# Altium PCB PS.PcbDoc
Units mm, origin at the board's own origin, x right, y up, seen from the top; angles counter-clockwise.
Board outline 152.4 x 101.6 mm, 2 copper layers (Top Layer, Bottom Layer); 14 components, 8 nets, 32 pads, 0 vias.
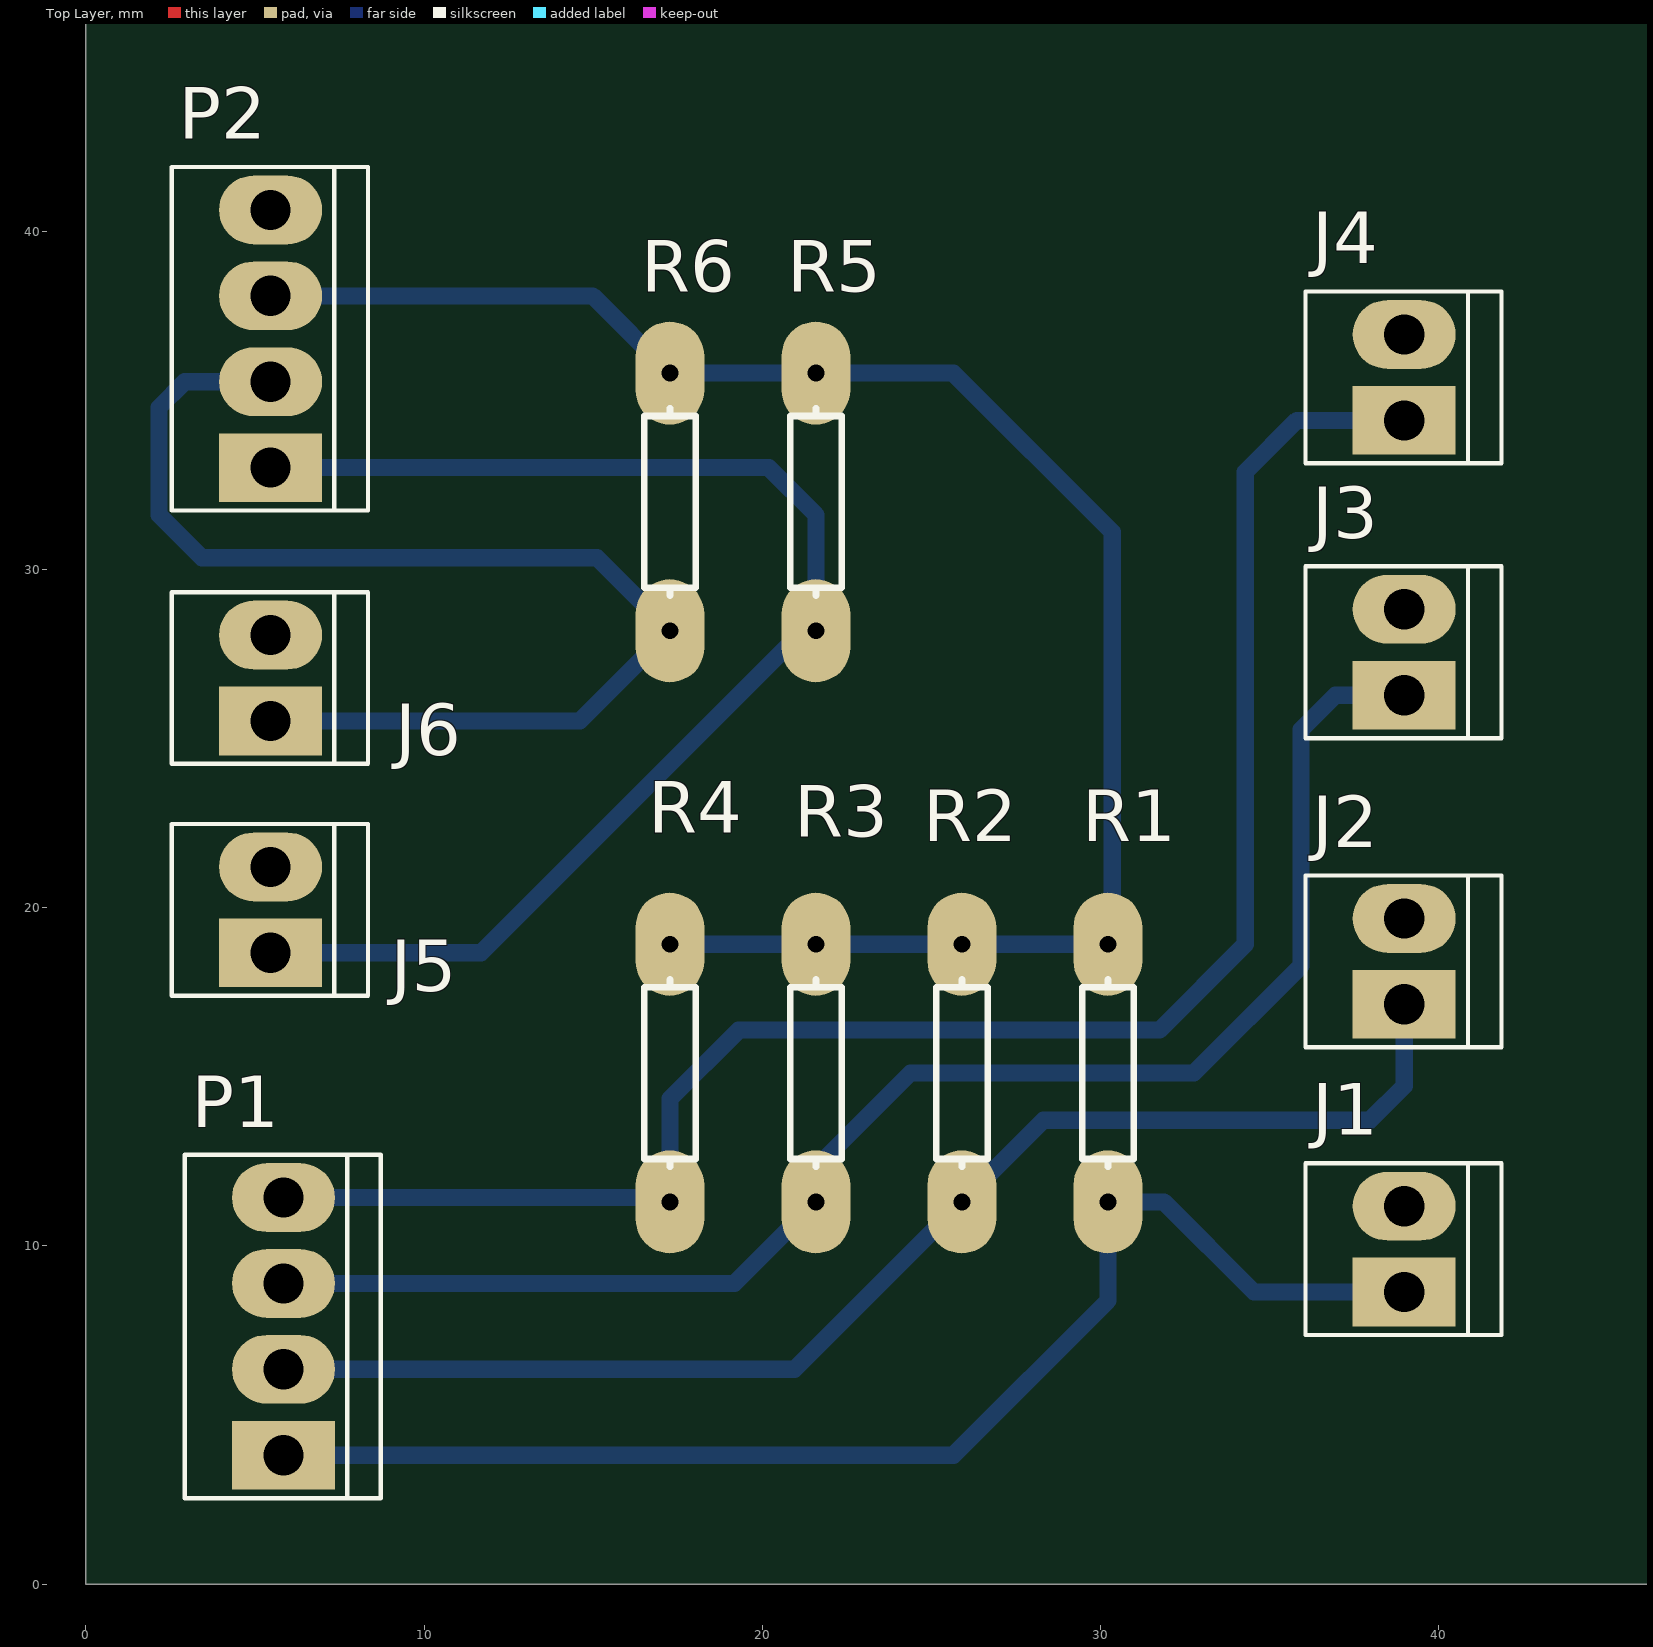
[diagram p0: Top Layer view]
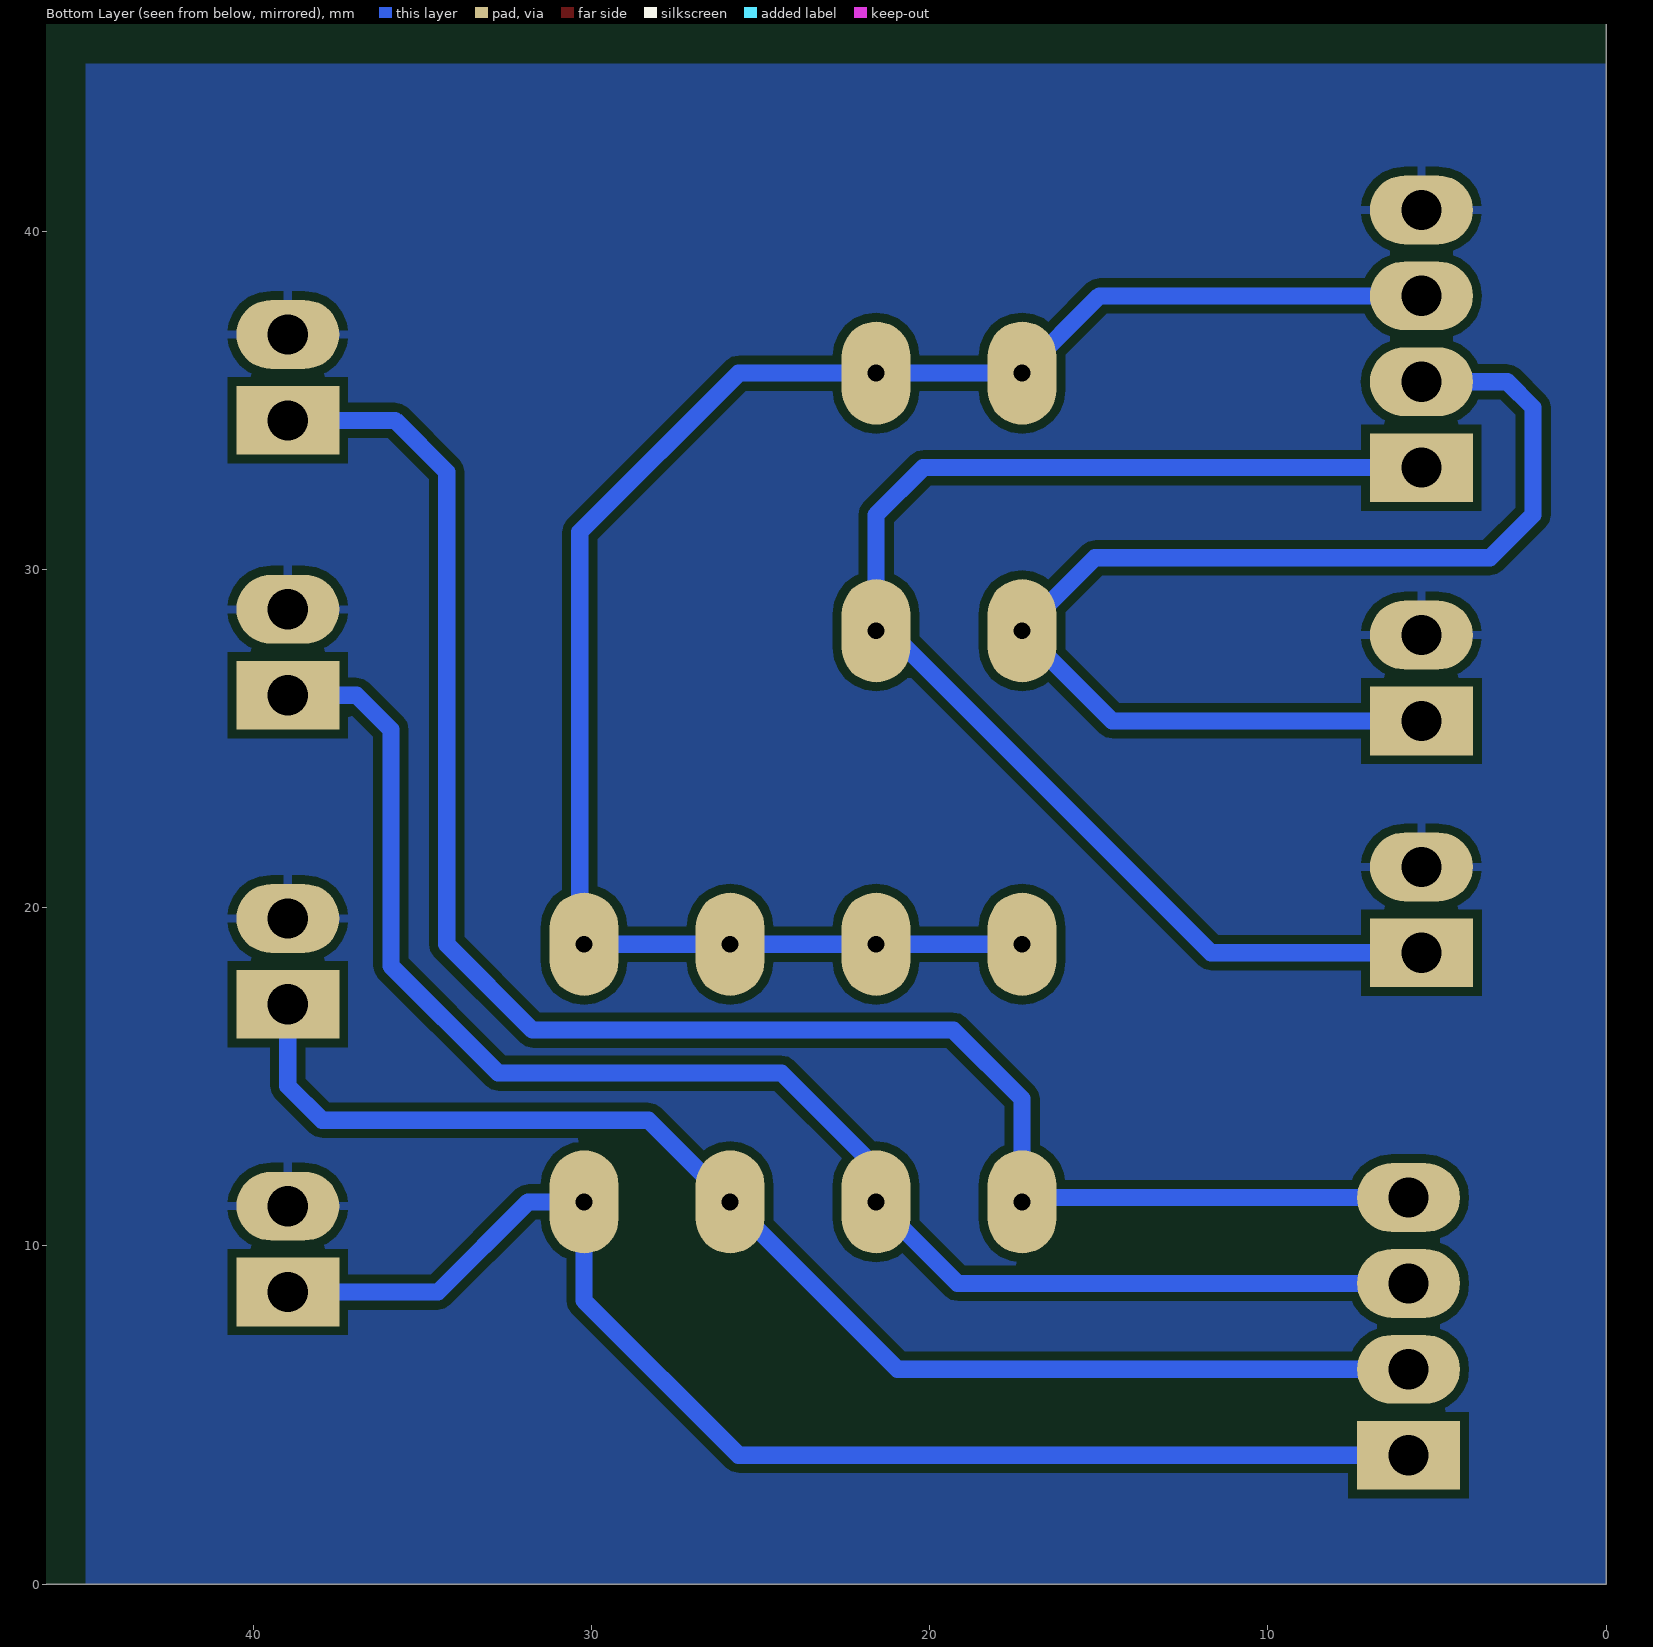
[diagram p1: Bottom Layer view, seen from below]

## Layer stack, top to bottom
Top Solder: solder mask 0.0102, Solder Resist, Dk 3.5
Top Layer: signal copper 0.0356
Dielectric 1: dielectric 0.32, FR-4, Dk 4.8
Bottom Layer: signal copper 0.0356
Bottom Solder: solder mask 0.0102, Solder Resist, Dk 3.5

## Board outline
0,0 152.4,0 152.4,101.6 0,101.6
cut-out: -7.493,69.342

## Design rules (kind name [scope] priority, off if disabled: settings)
Clearance [All] p1: gap=0.254 ignorepadtopadclearanceinfootprint=FALSE except(0: Arc-Hole Track-Hole SMDPad-Hole THPad-Hole Via-Hole Fill-Hole Poly-Hole Region-Hole Text-Hole)
PolygonConnect [All] p1: connectstyle=Relief reliefconductorwidth=0.254 reliefentries=4 polygonreliefangle="90 Angle" airgapwidth=0.254
RoutingVias [All] p1: holewidth=0.711 width=1.27 viastyle="Through Hole" minholewidth=0.711 minwidth=1.27 maxholewidth=0.711 maxwidth=1.27
SolderMaskExpansion [All] p1: expansion=0.102
Width [All] p1: maxlimit=0.508 minlimit=0.254 preferedwidth=0.254
30 further rules are at their usual default settings.

## Components (designator, comment, footprint, x,y, rotation, side; value= is the part's Value field where it differs from the comment)
J1 "Connecteur 2" Header_2Ecam 38.969,12.446 r270 top
J2 "Connecteur 2" Header_2Ecam 38.969,20.955 r270 top
J3 "Connecteur 2" Header_2Ecam 38.969,30.099 r270 top
J4 "Connecteur 2" Header_2Ecam 38.969,38.227 r270 top
J5 "Connecteur 2" Header_2Ecam 5.441,22.479 r270 top
J6 "Connecteur 2" Header_2Ecam 5.441,29.337 r270 top
P1 "Rasp_connecteur" Header4_ecam 5.822,12.7 r270 top
P2 "Power_Rasp_connecteur" Header4_ecam 5.441,41.91 r270 top
R1 "Résistance" AXIAL-0.3 30.226,11.303 r90 top
R2 "Résistance" AXIAL-0.3 25.908,11.303 r90 top
R3 "Résistance" AXIAL-0.3 21.59,11.303 r90 top
R4 "Résistance" AXIAL-0.3 17.272,11.303 r90 top
R5 "Résistance" AXIAL-0.3 21.59,28.194 r90 top
R6 "Résistance" AXIAL-0.3 17.272,28.194 r90 top

## Footprints (in the part's own frame and the unit in brackets; to place one, negate y for a bottom-side part, rotate by r counter-clockwise, add the part's x,y. Pads: shape width x height; smd on the part's side, far side on the other; paste and mask are expansions set on the pad)
AXIAL-0.3 [mil] "Resistor; 2 Leads"
  oval 120x80 hole 19.68: 1(0,0) 2(300,0)
  silkscreen extent 41,-30 259,30
Header4_ecam [mm]
  rect 2.032x3.048 hole 1.19: 1(8.89,0.02)
  oval 2.032x3.048 hole 1.19: 2(6.35,0.02) 3(3.81,0.02) 4(1.27,0.02)
  silkscreen extent 0,-2.9 10.16,2.9
Header_2Ecam [mm]
  rect 2.032x3.048 hole 1.19: 1(3.81,0.02)
  oval 2.032x3.048 hole 1.19: 2(1.27,0.02)
  silkscreen extent 0,-2.9 5.08,2.9

## Part data
J1 J2 J3 J4 J5 J6: "Connecteur", Designer="ECAM 2005", Supplier=ECAM, Type="Connecteur à vis"
P1 P2: library part "Header 4", "Header, 4-Pin", LatestRevisionDate=17-Jul-2002, LatestRevisionNote="Re-released for DXP Platform.", Publisher="Altium Limited", Supplier="Farnell 9731164"
R1 R2 R3 R4 R5 R6: "Résistance standard", Designer="ECAM 2005", Type="Résistance standard"

## Nets (pads, with @x,y where several pads share a name; then routed paths per layer and width w, separated by ;. In a path a pad name is that pad's centre, name@x,y a point inside that pad or via, vN(x,y) a via of type N, cw(c..) or ccw(c..) an arc to the next point about the centre after c; other vN are vias at no path point)
+3.3V: P2.3 R1.2 R2.2 R3.2 R4.2 R5.2 R6.2 | length 53
  Bottom Layer w0.508: P2.3 14.986,38.1 R6.2 R5.2 25.654,35.814 30.353,31.115 30.353,19.05 R1.2 R2.2 R3.2 R4.2
GND: J1.2 J2.2 J3.2 J4.2 J5.2 J6.2 P2.4
Sensor_BL: J5.1 P2.1 R5.1 | length 40.2
  Bottom Layer w0.508: J5.1 11.684,18.669 21.209,28.194 R5.1 21.59,31.623 20.193,33.02 P2.1
Sensor_BR: J6.1 P2.2 R6.1 | length 36.2
  Bottom Layer w0.508: J6.1 14.605,25.527 R6.1 15.113,30.353 3.429,30.353 2.159,31.623 2.159,34.798 2.921,35.56 P2.2
Sensor_FL: J1.1 P1.1 R1.1 | length 39.1
  Bottom Layer w0.508: P1.1 25.654,3.81 30.226,8.382 R1.1 31.877,11.303 34.544,8.636 J1.1
Sensor_FR: J2.1 P1.2 R2.1 | length 39
  Bottom Layer w0.508: P1.2 20.955,6.35 R2.1 28.321,13.716 37.973,13.716 38.989,14.732 J2.1
Sensor_L: J3.1 P1.3 R3.1 | length 45
  Bottom Layer w0.508: P1.3 19.177,8.89 R3.1 21.59,12.319 24.384,15.113 32.766,15.113 35.941,18.288 35.941,25.273 36.957,26.289 J3.1
Sensor_R: J4.1 P1.4 R4.1 | length 52.7
  Bottom Layer w0.508: P1.4 17.145,11.43 R4.1 17.272,14.351 19.304,16.383 31.75,16.383 34.29,18.923 34.29,32.893 35.814,34.417 J4.1

## Polygon pours and split planes (outlines as drawn)
GND on Bottom Layer (solid, remove dead copper, pour order 0): 0,0 0,44.958 44.958,44.958 44.958,0

## Silkscreen, mask and mechanical layers (free items; w line width, h text height)
Mechanical 1:
  lines w0.254: 0,0 45,0 45,45 0,45 0,0